# Altium PCB PCB1.PcbDoc
Units mm, origin at the board's own origin, x right, y up, seen from the top; angles counter-clockwise.
Board outline 182.19 x 56.11 mm, 2 copper layers (Top Layer, Bottom Layer); 74 components, 51 nets, 252 pads, 25 vias.
Unrouted connection lines stored in the file: 33.
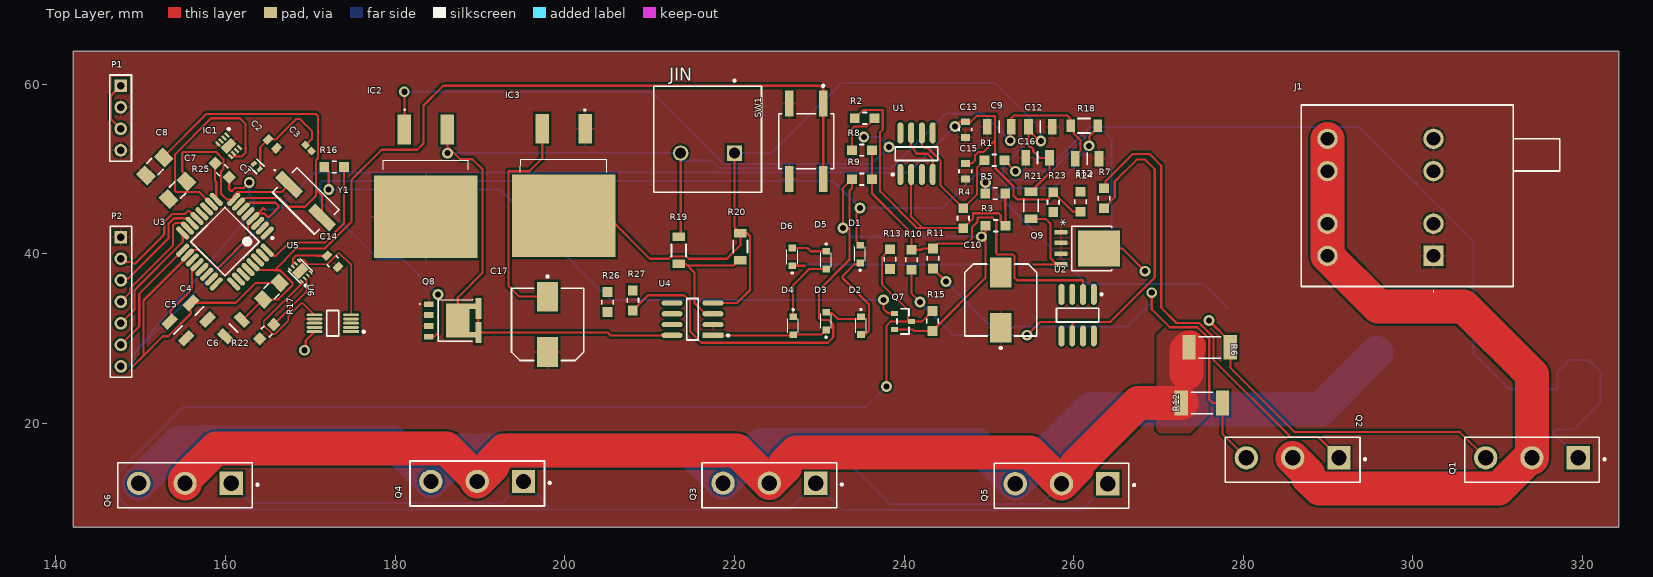
[diagram p0: Top Layer view]
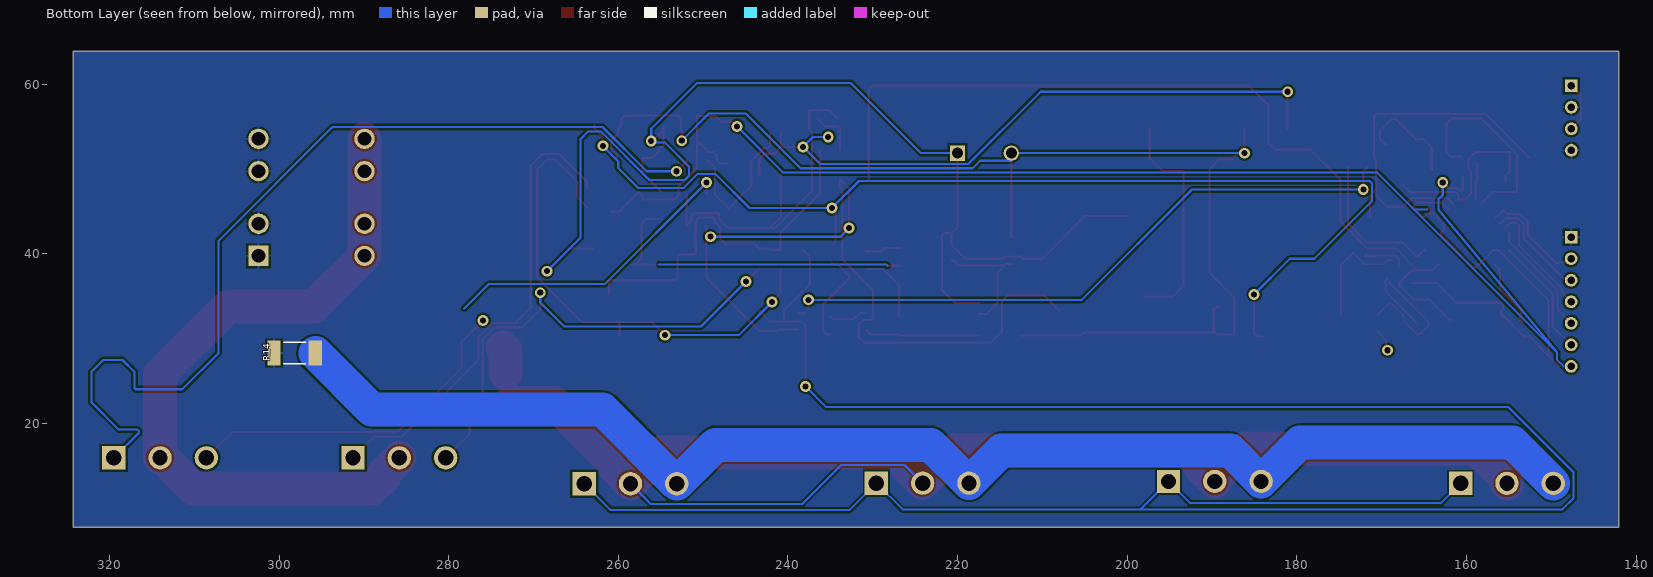
[diagram p1: Bottom Layer view, seen from below]
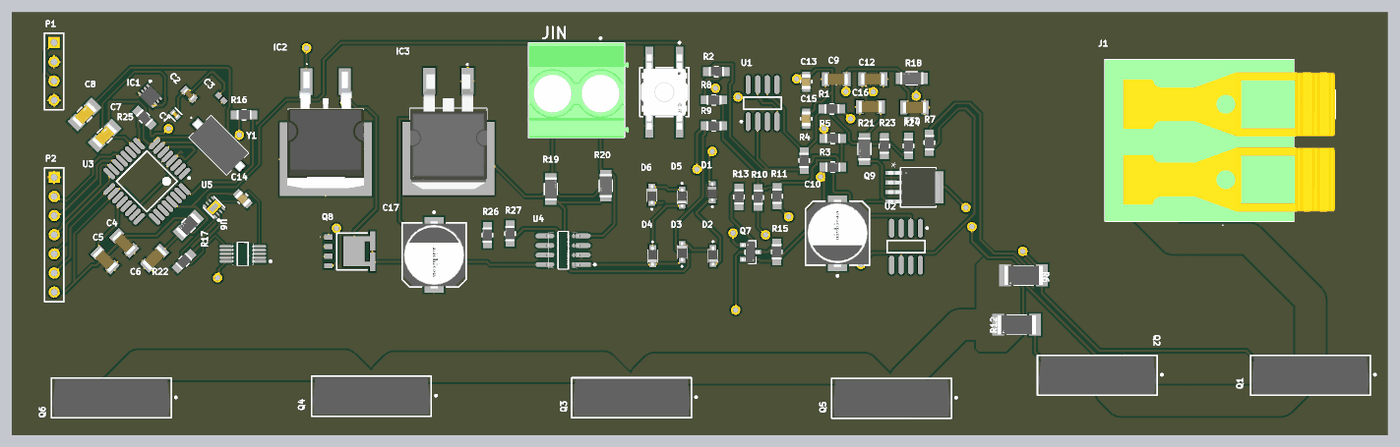
[diagram p2: 3D render of the assembled board from above, using the file's embedded part models]

## Layer stack, top to bottom
Top Solder: solder mask 0.0102, Solder Resist, Dk 3.5
Top Layer: signal copper 0.0356
Dielectric 1: dielectric 0.32, FR-4, Dk 4.8
Bottom Layer: signal copper 0.0356
Bottom Solder: solder mask 0.0102, Solder Resist, Dk 3.5

## Board outline
142.062,7.747 324.256,7.747 324.256,63.856 142.062,63.856

## Design rules (kind name [scope] priority, off if disabled: settings)
Clearance [All] p1: gap=0.254 ignorepadtopadclearanceinfootprint=FALSE except(0: Arc-Hole Track-Hole SMDPad-Hole THPad-Hole Via-Hole Fill-Hole Poly-Hole Region-Hole Text-Hole)
PolygonConnect [All] p1: connectstyle=Relief reliefconductorwidth=0.254 reliefentries=4 polygonreliefangle="90 Angle" airgapwidth=0.254
RoomDefinition Analog [InComponentClass('Analog')] p1: confinementstyle=ConfineIn formatcopy=TRUE lockcomponents=FALSE outline 0,0 50.8,0 50.8,25.4 0,25.4
RoutingVias [All] p1: holewidth=0.711 width=1.27 viastyle="Through Hole" minholewidth=0.711 minwidth=1.27 maxholewidth=0.711 maxwidth=1.27
SolderMaskExpansion [All] p1: expansion=0.102 istentingtop=FALSE
Width Width_3 [InNet('NetQ2_3')] p1: maxlimit=4 minlimit=0.254 preferedwidth=0.254 minimp=50.000000 maximp=50.000000 favimp=50.000000
Width Width_2 [InNet('NetQ3_2')] p2: maxlimit=4 minlimit=0.254 preferedwidth=0.254 minimp=50.000000 maximp=50.000000 favimp=50.000000
Width Width_1 [InNet('NetQ3_3')] p3: maxlimit=4 minlimit=0.254 preferedwidth=4 minimp=50.000000 maximp=50.000000 favimp=50.000000
Width [All] p4: maxlimit=4 minlimit=0.254 preferedwidth=0.254 minimp=50.000000 maximp=50.000000 favimp=50.000000
30 further rules are at their usual default settings.

## Classes and differential pairs
component class "Sense Amplifier": C15 R23 R24 R25 R26 R27 U6
component class Power: C9 C10 C11 C12 C16 C17 D1 D2 D3 D4 D5 D6 IC2 IC3 J2 JIN Q8 Q9 R18 R19 R20 R21 U4
component class MCU: C4 C5 C6 C7 C8 R17 SW1 U3 Y1
component class Main: J1 P2
component class "Fan Controller": C1 C2 C3 IC1 P1
component class DAC: C13 C14 R22 U5
component class Analog: Q1 Q2 Q3 Q4 Q5 Q6 Q7 R1 R2 R3 R4 R5 R6 R7 R8 R9 R10 R11 R12 R13 R14 R15 R16 U1 U2

## Components (designator, comment, footprint, x,y, rotation, side; value= is the part's Value field where it differs from the comment)
C1 "CL05A106MP5NUNC" FP-CL05A106MP5NUNC-MFG 163.678,50.292 r135 top value=10uF
C2 "CL10A226MP8NUNE" CAPC1608X105N 165.508,52.958 r135 top value=22uF
C3 "CL05B104KO5NNNC" CAPC1050X55X23ML05T13 169.774,52.476 r135 top
C4 "CL31A106MAHNNNE" CAPC3216X180N 156.904,33.241 r315 top
C5 "CL31B104KBCNNNC" CAPC3216X100N 154.381,31.013 r315 top
C6 "CL31B104KBCNNNC" CAPC3216X100N 160.934,31.242 r225 top
C7 "CL31C220JBCNNNC" FP-CL31-IPC_A 154.33,47.498 r45 top
C8 "CL31C220JBCNNNC" FP-CL31-IPC_A 151.663,50.292 r45 top
C9 "1uF" CAPC3216X178N 251.231,54.966 r0 top
C10 "UWT1H101MNL1GS" FP-UWT1H101MNL1GS-MFG 251.409,34.544 r90 top
C11 "1uF" CAPC3216X178N 261.595,51.232 r180 top
C12 "1uF" CAPC3216X178N 256.083,54.991 r180 top
C13 "C2012X7T2E104K125AE" FP-C2012-125-0_45-MFG 247.244,54.65 r270 top
C14 "C2012X7T2E104K125AE" FP-C2012-125-0_45-MFG 172.618,39.116 r315 top
C15 "C2012X7T2E104K125AE" FP-C2012-125-0_45-MFG 247.244,49.733 r270 top
C16 "1uF" CAPC3216X178N 255.753,51.308 r180 top
C17 "UWT1H101MNL1GS" FP-UWT1H101MNL1GS-MFG 197.968,31.674 r270 top
D1 "1SS355VMTE-17" UDZVTE1722B 234.823,39.488 r180 top
D2 "1SS355VMTE-17" UDZVTE1722B 234.925,32.005 r0 top
D3 "1SS355VMTE-17" UDZVTE1722B 230.81,31.588 r180 top
D4 "1SS355VMTE-17" UDZVTE1722B 226.924,31.988 r0 top
D5 "1SS355VMTE-17" UDZVTE1722B 230.81,39.727 r0 top
D6 "1SS355VMTE-17" UDZVTE1722B 226.822,39.158 r180 top
IC1 "DRV8220DSGR" SON50P200X200X80-9N 160.369,52.735 r315 top
IC2 "L7812ABD2T-TR" L7812ABD2TTR 183.617,54.649 r180 top
IC3 "L7912CD2T-TR" L7905CD2TTR 199.873,48.05 r180 top
J1 "1770393" 1770393 302.438,39.751 r90 top
JIN "1714955" PHOE-1714955_V 216.84,51.867 r180 top
P1 "Header 4" HDR1X4 147.625,59.817 r270 top
P2 "Header 7" HDR1X7 147.65,41.961 r270 top
Q1 "IRFP460APBF" FP-X13-0103-MFG 314.046,15.697 r270 top
Q2 "IRFP460APBF" FP-X13-0103-MFG 285.826,15.697 r270 top
Q3 "IRFP460APBF" FP-X13-0103-MFG 224.121,12.716 r270 top
Q4 "IRFP460APBF" FP-X13-0103-MFG 189.67,12.92 r270 top
Q5 "IRFP460APBF" FP-X13-0103-MFG 258.572,12.649 r270 top
Q6 "IRFP460APBF" FP-X13-0103-MFG 155.218,12.691 r270 top
Q7 "SS8050-G" FP-SS8050-G-MFG 239.884,32.029 r0 top
Q8 "SQJ147ELP-T1_GE3" SQJ147ELPT1_GE3 186.885,32.131 r270 top
Q9 "SQJ152ELP-T1_GE3" DPAK5_ELP-T1_GE3_VIS 262.115,40.64 r270 top
R1 "ERJ-P06F1002V" FP-ERJP06-MFG 250.666,51.029 r0 top
R2 "ERJ-P06F1002V" FP-ERJP06-MFG 235.356,55.982 r180 top
R3 "ERJ-P06F1002V" FP-ERJP06-MFG 250.793,43.307 r0 top
R4 "ERJ-P06F1002V" FP-ERJP06-MFG 246.99,44.196 r90 top
R5 "ERJ-P06F1002V" FP-ERJP06-MFG 250.768,47.117 r180 top
R6 "WSL2010R1000FEA18" FP-WSL2010-0_508-IPC_A 276.047,28.956 r180 top
R7 "ERJ-P06F1002V" FP-ERJP06-MFG 263.576,46.558 r90 top
R8 "ERJ-P06F1002V" FP-ERJP06-MFG 235.045,52.222 r0 top
R9 "ERJ-P06F1002V" FP-ERJP06-MFG 235.045,48.793 r0 top
R10 "ERJ-P06F1002V" FP-ERJP06-MFG 240.894,39.294 r270 top
R11 "ERJ-P06F1002V" FP-ERJP06-MFG 243.408,39.446 r270 top
R12 "WSL2010R1000FEA18" FP-WSL2010-0_508-IPC_A 275.133,22.403 r180 top
R13 "ERJ-P06F1002V" FP-ERJP06-MFG 238.354,39.37 r270 top
R14 "WSL2010R1000FEA18" FP-WSL2010-0_508-IPC_A 298.171,28.296 r180 bottom
R15 "ERJ-P06F1002V" FP-ERJP06-MFG 243.357,32.074 r90 top
R16 "ERJ-P06F1002V" FP-ERJP06-MFG 172.796,50.241 r0 top
R17 "RMCF1206FT10K0" FP-RMCF1206-IPC_B 165.412,35.593 r225 top
R18 "AC1206FR-104K7L" FP-AC1206-MFG 261.239,55.093 r180 top value=4.7KΩ
R19 "AC1206FR-104K7L" FP-AC1206-MFG 213.436,40.411 r90 top value=4.7KΩ
R20 "AC1206FR-104K7L" FP-AC1206-MFG 220.701,40.843 r270 top value=4.7KΩ
R21 "AC1206FR-104K7L" FP-AC1206-MFG 254.965,45.72 r270 top value=4.7KΩ
R22 "ERJ-P06F1002V" FP-ERJP06-MFG 164.839,30.828 r225 top
R23 "ERJ-P06F1002V" FP-ERJP06-MFG 257.607,46.094 r90 top
R24 "ERJ-P06F1002V" FP-ERJP06-MFG 260.807,46.126 r270 top
R25 "ERJ-P06F1002V" FP-ERJP06-MFG 159.596,49.853 r315 top
R26 "ERJ-P06F1002V" FP-ERJP06-MFG 205.029,34.309 r90 top
R27 "ERJ-P06F1002V" FP-ERJP06-MFG 208.026,34.493 r90 top
SW1 "1571634-2" FP-1571634-2-MFG 228.473,53.264 r270 top
U1 "OP07CSZ" ADI-R-8_M 241.478,51.802 r90 top
U2 "OP07CSZ" ADI-R-8_M 260.477,32.766 r270 top
U3 "ATmega328P-AU" 32A_M 159.928,41.434 r225 top
U4 "TLV9152IDR" FP-D0008A-IPC_A 215.062,32.283 r180 top
U5 "AD5693RACPZ-RL7" FP-CP-8-10-IPC_C 168.808,37.973 r135 top
U6 "INA228AIDGST" FP-DGS0010A-IPC_A 172.636,31.81 r180 top
Y1 "ECS-160-20-3X-TR" ECS160203XTR 169.443,46.228 r315 top

## Footprints (in the part's own frame and the unit in brackets; to place one, negate y for a bottom-side part, rotate by r counter-clockwise, add the part's x,y. Pads: shape width x height; smd on the part's side, far side on the other; paste and mask are expansions set on the pad)
32A_M [mm] "Thin QFP, 32-Leads, Body 7x7mm, Pitch 0.8mm, IPC Low Density"
  oval 1.95x0.6 smd: 1(-4.25,2.8) 2(-4.25,2) 3(-4.25,1.2) 4(-4.25,0.4) 5(-4.25,-0.4) 6(-4.25,-1.2) 7(-4.25,-2) 8(-4.25,-2.8) 17(4.25,-2.8) 18(4.25,-2) 19(4.25,-1.2) 20(4.25,-0.4) 21(4.25,0.4) 22(4.25,1.2) 23(4.25,2) 24(4.25,2.8)
  oval 0.6x1.95 smd: 9(-2.8,-4.25) 10(-2,-4.25) 11(-1.2,-4.25) 12(-0.4,-4.25) 13(0.4,-4.25) 14(1.2,-4.25) 15(2,-4.25) 16(2.8,-4.25) 25(2.8,4.25) 26(2,4.25) 27(1.2,4.25) 28(0.4,4.25) 29(-0.4,4.25) 30(-1.2,4.25) 31(-2,4.25) 32(-2.8,4.25)
  silkscreen extent -4.37,-2.85 2.85,3.77, body extent -3.5,-3.5 3.5,3.5, height 1.2
1770393 [mm]
  rect 2.4x2.4 hole 1.6: 1(0,0)
  round 2.4 hole 1.6: 2(0,12.5) 3(3.8,0) 4(3.8,12.5) 5(10,0) 6(10,12.5) 7(13.8,0) 8(13.8,12.5)
  silkscreen extent -4.2,-14.9 17.8,15.6, body extent -3.6,-14.9 17.8,15.6, height 29.64
ADI-R-8_M [mm] "SOIC, 8-Leads, Body 4.9x3.9mm, Pitch 1.27mm, IPC Low Density"
  oval 2.5x0.7 smd: 1(-2.45,1.905) 2(-2.45,0.635) 3(-2.45,-0.635) 4(-2.45,-1.905) 5(2.45,-1.905) 6(2.45,-0.635) 7(2.45,0.635) 8(2.45,1.905)
  silkscreen extent -2.57,-2.5 0.8,2.93, body extent -2,-2.5 2,2.5, height 1.75
CAPC1050X55X23ML05T13 [mm] "Chip Capacitor, 2-Leads, Body 1.05x0.55mm, IPC Low Density"
  rect 0.76x0.72 smd: 1(-0.49,0) 2(0.49,0)
  body extent -0.53,-0.28 0.53,0.27, height 0.55
CAPC1608X105N [mm]
  rect 0.83x1.07 smd: 1(-0.72,0) 2(0.72,0)
  body extent -0.8,-0.4 0.8,0.4, height 1.05
CAPC3216X100N [mm]
  rect 1.02x1.78 smd: 1(-1.38,0) 2(1.38,0)
  silkscreen extent 0,-0.7 0,0.7, body extent -1.6,-0.8 1.6,0.8, height 1
CAPC3216X178N [mm]
  rect 1.02x1.82 smd: 1(-1.4,0) 2(1.4,0)
  silkscreen extent 0,-0.7 0,0.7, body extent -1.6,-0.8 1.6,0.8, height 1.78
CAPC3216X180N [mm]
  rect 1.05x1.82 smd: 1(-1.39,0) 2(1.39,0)
  silkscreen extent 0,-0.7 0,0.7, body extent -1.6,-0.8 1.6,0.8, height 1.8
DPAK5_ELP-T1_GE3_VIS [mil]
  rect 21x60 smd paste+0 mask+0: 1(-75,-142) 2(-25,-142) 3(25,-142) 4(75,-142)
  rect 167x193 smd paste+0 mask+0: 5(0,34.5)
  silkscreen extent -104,-93 104,93, body extent -99,-158 99,110, height 43
ECS160203XTR [mm]
  rect 3.5x1.2 smd: 1(-2.75,0) 2(2.75,0)
  silkscreen extent -5.2,-2.05 3.5,2.05, body extent -4.38,-2.05 4.38,2.05, height 2.4
FP-1571634-2-MFG [mm]
  rect 3.1x1 smd paste+0 mask+0: 1(-4.45,2) 2(4.45,2) 3(-4.45,-2) 4(4.45,-2)
  silkscreen extent -6.67,-3.25 3.25,3.25, body extent -6.1,-3.35 6.1,3.35, height 0.25
FP-AC1206-MFG [mm]
  rect 1x1.5 smd paste+0 mask+0: 1(-1.6,0) 2(1.6,0)
  silkscreen extent -0.73,-0.85 0.73,0.85, body extent -2.2,-0.95 2.2,0.95, height 0.25
FP-C2012-125-0_45-MFG [mm]
  rect 0.8x1.05 smd paste+0 mask+0: 1(-0.925,0) 2(0.925,0)
  silkscreen extent -0.15,-0.75 0.15,0.75, body extent -1.42,-0.85 1.42,0.85, height 0.25
FP-CL05A106MP5NUNC-MFG [mm]
  rect 0.45x0.675 smd paste+0 mask+0: 1(-0.463,0) 2(0.462,0)
  silkscreen extent -0.6,-0.63 0.6,0.63, body extent -0.5,-0.25 0.5,0.25, height 0.7
FP-CL31-IPC_A [mm]
  rect 1.505x1.858 smd paste+0 mask+0: 1(-1.476,0) 2(1.476,0)
  silkscreen extent -0.42,-0.93 0.42,0.93, body extent -2.73,-1.43 2.73,1.43, height 0.25
FP-CP-8-10-IPC_C [mm]
  rect 0.556x0.242 smd paste+0 mask+0: 1(-0.978,0.75)
  rrect100% 0.556x0.242 smd paste+0 mask+0: 2(-0.978,0.25) 3(-0.978,-0.25) 4(-0.978,-0.75) 5(0.978,-0.75) 6(0.978,-0.25) 7(0.978,0.25) 8(0.978,0.75)
  rect 1.1x1.7 smd paste-1000 mask+0: 9(0,0)
  silkscreen extent -1.78,-1 1,1
FP-D0008A-IPC_A [mm]
  rect 2.469x0.622 smd paste+0 mask+0: 1(-2.414,1.905)
  rrect100% 2.469x0.622 smd paste+0 mask+0: 2(-2.414,0.635) 3(-2.414,-0.635) 4(-2.414,-1.905) 5(2.414,-1.905) 6(2.414,-0.635) 7(2.414,0.635) 8(2.414,1.905)
  silkscreen extent -4.32,-2.45 0.68,2.45, body extent -4.15,-2.95 4.15,2.95, height 0.25
FP-DGS0010A-IPC_A [mm]
  rect 1.857x0.35 smd paste+0 mask+0: 1(-2.151,1)
  rrect100% 1.857x0.35 smd paste+0 mask+0: 2(-2.151,0.5) 3(-2.151,0) 4(-2.151,-0.5) 5(-2.151,-1) 6(2.151,-1) 7(2.151,-0.5) 8(2.151,0) 9(2.151,0.5) 10(2.151,1)
  silkscreen extent -3.78,-1.5 0.72,1.5, body extent -3.58,-2 3.58,2, height 0.25
FP-ERJP06-MFG [mm]
  rect 1.15x1.15 smd paste+0 mask+0: 1(-1.175,0) 2(1.175,0)
  silkscreen extent -0.22,-0.67 0.22,0.67, body extent -1.85,-0.77 1.85,0.77, height 0.25
FP-RMCF1206-IPC_B [mm]
  rect 1.404x1.758 smd paste+0 mask+0: 1(-1.376,0) 2(1.376,0)
  silkscreen extent -0.37,-0.88 0.37,0.88, body extent -2.33,-1.13 2.33,1.13, height 0.25
FP-SS8050-G-MFG [mm]
  rect 0.8x0.6 smd paste+0 mask+0: 1(-1.01,0.95) 2(-1.01,-0.95) 3(1.01,0)
  silkscreen extent -0.7,-1.5 0.7,1.5, body extent -1.51,-1.6 1.51,1.6, height 0.25
FP-UWT1H101MNL1GS-MFG [mm]
  rect 3.5x2.5 smd paste+0 mask+0: 1(-3.25,0) 2(3.25,0)
  silkscreen extent -5.77,-4.25 4.25,4.25, body extent -5.25,-4.5 5.25,4.5, height 0.25
FP-WSL2010-0_508-IPC_A [mm]
  rect 1.57x2.899 smd paste+0 mask+0: 1(-2.435,0) 2(2.435,0)
  silkscreen extent -1.27,-1.27 1.27,1.27, body extent -3.72,-1.95 3.72,1.95, height 0.25
FP-X13-0103-MFG [mm]
  rect 2.75x2.75 hole 1.8 paste-1000 mask+0: 1(-0.237,5.46)
  round 2.75 hole 1.8 paste-1000 mask+0: 2(-0.237,0) 3(-0.237,-5.46)
  silkscreen extent -2.66,-7.94 2.66,8.68, body extent -2.76,-8.04 2.76,8.04, height 0.25
HDR1X4 [mm] "Connector; Header; 4 Position"
  rect 1.5x1.5 hole 0.9: 1(0,0)
  round 1.5 hole 0.9: 2(2.54,0) 3(5.08,0) 4(7.62,0)
  silkscreen extent -1.27,-1.27 8.89,1.27
HDR1X7 [mm] "Connector; Header; 7 Position"
  rect 1.5x1.5 hole 0.9: 1(0,0)
  round 1.5 hole 0.9: 2(2.54,0) 3(5.08,0) 4(7.62,0) 5(10.16,0) 6(12.7,0) 7(15.24,0)
  silkscreen extent -1.27,-1.27 16.51,1.27
L7812ABD2TTR [mm]
  rect 1.6x3.5 smd: 1(2.54,0) 3(-2.54,0)
  rect 12.2x9.75 smd: 2(0,10.275)
  silkscreen extent -5,-2.4 5,4.75, body extent -5.1,-1.33 5.1,14.09, height 4.83
L7905CD2TTR [mm]
  rect 1.6x3.5 smd: 1(-2.54,-6.7) 2(2.54,-6.7)
  rect 12.2x9.75 smd: 3(0,3.575)
  silkscreen extent -5.1,-9 5.1,-1.56, body extent -5.08,-7.63 5.08,7.64, height 5.01
PHOE-1714955_V [mm] "Terminal Block, 2-Leads, Body 12.7x12.5mm, Pitch 6.35mm"
  rect 1.8x1.8 hole 1.3: 1(-3.175,0)
  round 1.8 hole 1.3: 2(3.175,0)
  silkscreen extent -6.35,-8.67 6.35,4.6, body extent -6.92,-7.9 6.35,4.6, height 21.51
SON50P200X200X80-9N [mm]
  rect 0.7x0.3 smd: 1(-1.05,0.75) 2(-1.05,0.25) 3(-1.05,-0.25) 4(-1.05,-0.75) 5(1.05,-0.75) 6(1.05,-0.25) 7(1.05,0.25) 8(1.05,0.75)
  rect 1x1.7 smd: 9(0,0)
  silkscreen extent -1.52,1.28 -1.28,1.52, body extent -1,-1 1,1, height 0.77
SQJ147ELPT1_GE3 [mm]
  rect 0.68x1.1 smd: 1(-1.905,-2.913) 2(-0.635,-2.913) 3(0.635,-2.913) 4(1.905,-2.913)
  rect 2.5x0.71 smd: 5(1.4,2.913) 6(-1.4,2.913)
  rect 0.63x0.66 smd: 7(1.665,2.228) 8(-1.665,2.228)
  rect 3.96x2.82 smd: 9(0,0.487)
  silkscreen extent -2.45,-4.05 2.45,2.23
UDZVTE1722B [mm]
  rect 0.9x0.8 smd: 1(0,0.575) 2(0,-1.525)
  silkscreen extent -0.62,-1.33 0.62,1.52, body extent -0.63,-1.76 0.63,0.74, height 0.71

## Part data
C1: library part CMP-13271-000002-1, "CAP CER 10UF 10V X5R 0402", Capacitance=10uF, Manufacturer=Samsung, Temperature="-55°C to +85°C", Temperature Characteristic=X5R, Temperature Coefficient=15%, Temperature Range High=+85°C, Temperature Range Low=-55°C, Tolerance=20%, Voltage Rating=10V, Automotive=No, Category=Cap, ComponentLink2Description=Datasheet, ComponentLink2URL=http://www.samsungsem.com/kr/support/product-search/mlcc/__icsFiles/afieldfile/2019/05/10/19-CL05A106MP5NUNC.pdf, Device Class L1="Passive Components", Device Class L2=Capacitors, Device Class L3="Ceramic Capacitors", Digikey Description="CAP CER 10UF 10V X5R 0402", Height=0.7mm, Ipc Land Pattern Name=CAPC10050X50, Lead Free=Yes, Manufacturer Part Number=CL05A106MP5NUNC, Material=Ceramic, Octopart=https://octopart.com/cl05a106mp5nunc-samsung-22457395, Package=CL05A106MP5NUNC, RoHS=TRUE
C2: "Capacitor", Manufacturer_Name=SAMSUNG, Mouser Part Number=187-CL10A226MP8NUNE, Arrow Part Number=CL10A226MP8NUNE, Arrow Price/Stock=https://www.arrow.com/en/products/cl10a226mp8nune/samsung-electro-mechanics?region=nac, Datasheet Link=https://datasheet.datasheetarchive.com/originals/distributors/Datasheets-DGA10/2407063.pdf, Height=1.05mm, Manufacturer_Part_Number=CL10A226MP8NUNE, Mouser Price/Stock=https://www.mouser.co.uk/ProductDetail/Samsung-Electro-Mechanics/CL10A226MP8NUNE?qs=gRKWieUq2Hb5O0PTfRKzDQ%3D%3D
C3: library part CMP-2000-05439-1, "Chip Capacitor, 100 nF, +/- 10%, 16 V, -55 to 125 degC, 0402 (1005 Metric), RoHS, Tape and Reel", Capacitance=100nF, Case Size/Dimension=0402, Dielectric=X7R, Manufacturer="Samsung Electro-Mechanics", Rated Voltage=16V, Tolerance (%)=±10%, Datasheet URL=https://datasheet.ciiva.com/29198/458718-da-01-en-vs-kondensator-0402-29198423.pdf, Datasheet Version=Nov-10, Manufacturer URL=http://www.samsungsem.com/global/index.jsp
C4: "CAP CER 10UF 25V X5R 1206 CL31A106MAHNNNE", Capacitance=10uF, Manufacturer_Name=SAMSUNG, Mouser Part Number=187-CL31A106MAHNNNE, Supplier Part Number 1=1276-1181-1-ND, Arrow Part Number=CL31A106MAHNNNE, Arrow Price/Stock=https://www.arrow.com/en/products/cl31a106mahnnne/samsung-electro-mechanics, Datasheet Link=https://www.arrow.com/en/products/cl31a106mahnnne/samsung-electro-mechanics, Height=1.8mm, Manufacturer_Part_Number=CL31A106MAHNNNE, Mouser Price/Stock=https://www.mouser.co.uk/ProductDetail/Samsung-Electro-Mechanics/CL31A106MAHNNNE?qs=9y2YoPkPyvYkOWbcUKSn%252BQ%3D%3D, Supplier 1=Digi-Key
C5 C6: "CAP CER 0.1UF 50V X7R 1206", Capacitance=0.1uF, Manufacturer_Name=SAMSUNG, Mouser Part Number=187-CL31B104KBCNNNC, Supplier Part Number 1=1276-1017-1-ND, Arrow Part Number=CL31B104KBCNNNC, Arrow Price/Stock=https://www.arrow.com/en/products/cl31b104kbcnnnc/samsung-electro-mechanics?region=nac, Datasheet Link=https://datasheet.datasheetarchive.com/originals/distributors/Datasheets_SAMA/0fdb6a11e020a7299f4d0713dd2bd7ee.pdf, Height=1mm, Mouser Price/Stock=https://www.mouser.co.uk/ProductDetail/Samsung-Electro-Mechanics/CL31B104KBCNNNC?qs=349EhDEZ59oHABbyGq1iKA%3D%3D, Supplier 1=Digi-Key
  C5: Manufacturer_Part_Number 1=CL31B104KBCNNNC
  C6: Manufacturer_Part_Number=CL31B104KBCNNNC
C7 C8: library part CMP-13271-001055-1, "Cap Ceramic 22pF 50V C0G ±5% SMD 1206 +125°C Embossed T/R", Capacitance=22pF, Case Code (Imperial)=1206, Case Code (Metric)=3216, Dielectric=C0G, Max Operating Temperature=125°C, Min Operating Temperature=-55°C, Package Quantity=1, Temperature Coefficient=300ppm/°C, Tolerance=5%, Voltage=50V, Case/Package=1206, Depth=1.6mm, Height=0.85mm, Lead Free="Lead Free", Length=3.2mm, Material=Ceramic, Mount="Surface Mount", Packaging="Tape and Reel", Radiation Hardening=No, Thickness=0.039inch, Voltage Rating=50V, Voltage Rating (DC)=50V, Width=0.063inch
C9 C11 C12 C16: library part 12063C105MAT2A, "Capacitor 12063C105MAT2A", Manufacturer_Name=AVX, Mouser Part Number=581-12063C105MAT2A, Arrow Part Number=12063C105MAT2A, Arrow Price/Stock=https://www.arrow.com/en/products/12063c105mat2a/avx, Datasheet Link=https://spicat.kyocera-avx.com/product/mlcc/chartview/12063C105MAT2A/DataSheet/X7R, Height=1.78mm, Manufacturer_Part_Number=12063C105MAT2A, Mouser Price/Stock=https://www.mouser.com/Search/Refine.aspx?Keyword=581-12063C105MAT2A
C10 C17: library part CMP-2000-07373-2, "CAP ALUM 100UF 20% 50V SMD", Capacitance=100uF, Case/Package=Radial, Dielectric Material=Aluminium, Leakage Current=3uA, Max Operating Temperature=105°C, Min Operating Temperature=-55°C, Package Quantity=500, Ripple Current=140mA, Tolerance=20%, Voltage=50V, Construction=Cylindrical, Diameter=8mm, Dissipation Factor=0.14%, Height=10mm, Height - Seated (Max)=0.413inch, Lead Free="Lead Free", Length=10mm, Life (Hours)=1000Hour, Mount="Surface Mount", Number of Pins=2, Packaging="Tape and Reel", Radiation Hardening=No, REACH SVHC="No SVHC", Ripple Current (AC)=140mA, RoHS Compliant=Yes, Series=WT, Termination=SMD/SMT, Voltage Rating=50V, Voltage Rating (DC)=50V
C13 C14 C15: library part CMP-08246-004341-1, "CAP CER 0.1UF 250V X7T 0805", Capacitance=100nF, Case Code (Imperial)=0805, Case Code (Metric)=2012, Dielectric=X7T, Max Operating Temperature=125°C, Min Operating Temperature=-55°C, Package Quantity=1, Resistor Type=Ceramic, Tolerance=10%, Voltage Rating=250V, Case/Package=0805, Depth=1.25mm, Features="Soft Termination", Height=1.25mm, Length=2mm, Mount="Surface Mount", Packaging="Tape and Reel", REACH SVHC="No SVHC", RoHS Compliant=Yes, Series=C, Termination=SMD/SMT, Thickness=0.049inch, Voltage Rating (DC)=250V, Weight=0.000194oz, Width=0.05inch
D1 D2 D3 D4 D5 D6: "Diode", Manufacturer_Name="ROHM Semiconductor", Mouser Part Number=755-1SS355VMTE-17, Datasheet Link=https://datasheet.datasheetarchive.com/originals/distributors/Datasheets_SAMA/726503b2436a9ce4bc644e4966373f1b.pdf, Height=0mm, Manufacturer_Part_Number=1SS355VMTE-17, Mouser Price/Stock=https://www.mouser.co.uk/ProductDetail/ROHM-Semiconductor/1SS355VMTE-17?qs=IsRgwgmxh693733hapxfjA%3D%3D
IC1: "Integrated Circuit", Manufacturer_Name="Texas Instruments", Mouser Part Number=595-DRV8220DSGR, Arrow Part Number=DRV8220DSGR, Arrow Price/Stock=https://www.arrow.com/en/products/drv8220dsgr/texas-instruments?region=nac, Datasheet Link=https://www.ti.com/lit/gpn/drv8220, Height=0.8mm, Manufacturer_Part_Number=DRV8220DSGR, Mouser Price/Stock=https://www.mouser.co.uk/ProductDetail/Texas-Instruments/DRV8220DSGR?qs=A6eO%252BMLsxmR1BpX9iMystg%3D%3D
IC2: "Integrated Circuit", Manufacturer_Name=STMicroelectronics, Mouser Part Number=511-L7812ABD2T-TR, Arrow Part Number=L7812ABD2T-TR, Arrow Price/Stock=https://www.arrow.com/en/products/l7812abd2t-tr/stmicroelectronics?region=europe, Datasheet Link=https://componentsearchengine.com/Datasheets/1/L7812ABD2T-TR.pdf, Height=4.7mm, Manufacturer_Part_Number=L7812ABD2T-TR, Mouser Price/Stock=https://www.mouser.co.uk/ProductDetail/STMicroelectronics/L7812ABD2T-TR?qs=llfGyK1OjE3hWetai%252BQcKg%3D%3D
IC3: "Integrated Circuit", Manufacturer_Name=STMicroelectronics, Mouser Part Number=511-L7912CD2T-TR, Arrow Part Number=L7912CD2T-TR, Arrow Price/Stock=https://www.arrow.com/en/products/l7912cd2t-tr/stmicroelectronics?region=nac, Datasheet Link=http://www.st.com/web/en/resource/technical/document/datasheet/CD00000450.pdf, Height=4.6mm, Manufacturer_Part_Number=L7912CD2T-TR, Mouser Price/Stock=https://www.mouser.co.uk/ProductDetail/STMicroelectronics/L7912CD2T-TR?qs=3sbPgdekz232r2AmOaAD%252Bg%3D%3D
J1: "Connector", Manufacturer_Name="Phoenix Contact", Mouser Part Number=651-1770393, Arrow Part Number=1770393, Arrow Price/Stock=https://www.arrow.com/en/products/1770393/phoenix-contact, Datasheet Link=https://www.phoenixcontact.com/online/portal/us/pxc/product_detail_page/!ut/p/z1/3Vdbb9owFP4r9IFHYzsXJ5m0B6BoQCkLJawkL1HsGOQ1tyYBOn79HC7dQBs8VGhaoiPFds75zsX-rBzowTn0kmAtlkEp0iSI5Nz1iO90nF7PVgj-OtE7aHCvd3sj7Qn3xwr8Bj3olQGFLq5GkaB5kP-A7qrgSbWQiVB-MgykWmo1Tx, Height=29.2mm, Manufacturer_Part_Number=1770393, Mouser Price/Stock=https://www.mouser.co.uk/ProductDetail/Phoenix-Contact/1770393?qs=MfVUZiz0PxY16TK7qzndTA%3D%3D
JIN: library part CMP-2000-05797-1, "PC Terminal Block, Pitch 6.35 mm, 1 x 2 Position, Height 21.5 mm, Tail Lenght 5.1 mm, RoHS, Bulk", Manufacturer="Phoenix Contact", Package Description="PC Terminal Block, Pitch 6.35 mm, 1 x 2 Position, Height 21.5 mm, Tail Lenght 5.1 mm", Datasheet URL=http://media.digikey.com/pdf/Data%20Sheets/Phoenix%20Contact%20PDFs/1714955.pdf, Datasheet Version=02/2010, Manufacturer URL=http://www.phoenixcontact.com/, Mounting Technology=ThroughHole, Package Reference=1714955
P1: "Header, 4-Pin", LatestRevisionDate=17-Jul-2002, LatestRevisionNote="Re-released for DXP Platform.", Publisher="Altium Limited"
P2: "Header, 7-Pin", LatestRevisionDate=17-Jul-2002, LatestRevisionNote="Re-released for DXP Platform.", Publisher="Altium Limited"
Q1 Q2 Q3 Q4 Q5 Q6: library part CMP-02550-000181-1, "MOSFET N-CH 500V 20A TO-247AC", Continuous Drain Current=20A, Drain To Source Breakdown Voltage=500V, Drain To Source Resistance=0.27Ω, Gate To Source Voltage=30V, Input Capacitace At Vds="3100pF @ 25V", Manufacturer=Vishay, Max Forward Diode Voltage=1.8V, Max Junction Temp=+150°C, Package=X13-0103, Power Dissipation=280W, Pulse Drain Current=80A, Temperature="-55°C to +150°C", Temperature Range Low=-55°C, Automotive=No, Category=Trans, ComponentLink2Description=Datasheet, ComponentLink2URL=http://www.vishay.com/docs/91234/sihfp460.pdf, Depletion Mode=False, Device Class L1="Discrete Semiconductors", Device Class L2=Transistors, Device Class L3=MOSFETs, Digikey Description="MOSFET N-CH 500V 20A TO-247AC", Drain To Source Voltage=500V, Gate Charge At Vgs="105nC @ 10V", Height=25.11mm, Lead Free=Yes, Manufacturer Part Number=IRFP460APBF, Mouser Description="MOSFET N-Chan 500V 20 Amp", Number Of Channels=1, Number Of N Channels=1, Octopart=https://octopart.com/irfp460apbf-vishay-46526673, Reverse Recovery Charge=5000nC, Reverse Recovery Time=480ns, RoHS=TRUE, Rthja Max=40°C/W, Standoff Height=3.71mm, Temperature Range High=+150°C, Threshold Vgs Max=4V, Threshold Vgs Min=2V, Turn Off Delay Time=45ns, Turn On Delay Time=18ns
Q7: library part CMP-20235-000001-1, "NPN TRANSISTOR 1.5A 40V SOT-23 R", Case/Package=TO-236-3, Collector Emitter Breakdown Voltage=25V, Collector Emitter Voltage (VCEO)=400mV, Max Collector Current=1.5A, Max Power Dissipation=300mW, Transition Frequency=100MHz, Max Breakdown Voltage=25V, Mount="Surface Mount", Packaging="Tape and Reel", RoHS Compliant=Yes
Q8: "MOSFET (N-Channel)", Manufacturer_Name=Vishay, Mouser Part Number=78-SQJ147ELP-T1_GE3, Arrow Part Number=SQJ147ELP-T1_GE3, Arrow Price/Stock=https://www.arrow.com/en/products/sqj147elp-t1-ge3/vishay?region=nac, Datasheet Link=https://www.vishay.com/docs/77857/sqj147elp.pdf, Height=1.227mm, Manufacturer_Part_Number=SQJ147ELP-T1_GE3, Mouser Price/Stock=https://www.mouser.co.uk/ProductDetail/Vishay-Siliconix/SQJ147ELP-T1_GE3?qs=81r%252BiQLm7BRdyhBg3DuaKw%3D%3D
Q9: "No Description Available", Mfr_Name=Vishay, Copyright="Copyright (C) 2023 Ultra Librarian. All rights reserved.", Manufacturer_Part_Number=SQJ152ELP-T1_GE3, RefDes=RefDes, Type=DEV
R1 R2 R3 R4 R5 R7 R8 R9 R10 R11 R13 R15 R16 R22 R23 R24 R25 R26 R27: library part CMP-05422-000126-1, "RES SMD 10K OHM 1% 1/2W 0805", Case Code (Imperial)=0805, Case Code (Metric)=2012, Max Operating Temperature=155°C, Max Power Dissipation=500mW, Min Operating Temperature=-55°C, Package Quantity=5000, resistance=10kR, Resistance Tolerance=1%, Resistor Type="Thick Film", Temperature Coefficient=100ppm/°C, Voltage Rating=150V, Case/Package=0805, Construction=Rectangular, Contact Plating=Tin, Depth=1.25mm, Features="Automotive AEC-Q200", Height=0.6mm, Lead Free="Lead Free", Length=2mm, Military Standard=Not, Mount="Surface Mount", Number of Terminations=2, Packaging="Tape and Reel", Power Rating=500mW, Radiation Hardening=No, REACH SVHC="No SVHC", RoHS Compliant=Yes, Series=ERJ, Technology="THICK FILM", Termination=SMD/SMT, Tolerance=1%, Voltage Rating (DC)=150V, Width=1.2mm
R6 R12 R14: library part CMP-00030-39744249-1, "WSL2010R1000FEA18 SMD Chip Resistor, 100 MOhm, ± 1%, 1 W, 2010 [5025 Metric], Metal Strip, High Power", Case Code (Imperial)=2010, Case Code (Metric)=5025, Max Operating Temperature=170°C, Min Operating Temperature=-65°C, Power Rating=1W, resistance=100mΩ, Temperature Coefficient=75ppm/°C, Tolerance=1%, Case/Package=2010, Composition="Metal Element, Metal Strip", Contact Plating=Tin, Depth=2.54mm, Height=635µm, Lead Free="Lead Free", Length=5mm, NexarPartId=39744249, Number of Pins=2, Packaging="Cut Tape", Radiation Hardening=No, REACH SVHC=Unknown, RoHS=Compliant, Schedule B="8533210045, 8533210045", Termination=SMD/SMT, Weight=38.895546mg, Width=2.5mm
R17: library part CMP-26527-000151-1, "10kΩ ±1% 0.25W 1206 Thick Film Chip Resistor AEC-Q200 compliant RMCF1206FT10K0", Case Code (Imperial)=1206, Case Code (Metric)=3216, Max Operating Temperature=155°C, Max Power Dissipation=250mW, Min Operating Temperature=-55°C, resistance=10kR, Resistor Type="Thick Film", Temperature Coefficient=100ppm/°C, Tolerance=1%, Case/Package=1206, Construction=Rectangular, Contact Plating=Tin, Depth=1.6mm, Features="Automotive AEC-Q200", Height=0.028inch, Lead Free="Lead Free", Length=3.2mm, Military Standard=Not, Mount="Surface Mount", Number of Terminations=2, Packaging="Tape and Reel", Power Rating=250mW, Radiation Hardening=No, RoHS Compliant=Yes, Series=RMCF, Size Code=1206, Width=0.063inch
R18 R19 R20 R21: library part CMP-03412-035718-1, "AC1206 4.7KΩ 0.25W 1.00%", Manufacturer=Yageo, Package=AC1206, Power Rating=0.25W, resistance=4.7KΩ, Temperature="-55°C to +155°C", Temperature Range High=+155°C, Temperature Range Low=-55°C, Tolerance=0.01, Voltage Rating=200V, Automotive=Yes, Automotive Grade="Grade 0", Category=Res, ComponentLink2Description=Datasheet, ComponentLink2URL=http://www.yageo.com/NewPortal/yageodocoutput?fileName=/pdf/R-Chip/PYu-AC_51_RoHS_L_6.pdf, Composition="Thick Film", Device Class L1="Passive Components", Device Class L2=Resistors, Device Class L3="Chip SMD Resistors", Footprint Url=http://www.yageo.com/exep/pages/download/literatures/PYu-R_Mount_10.pdf, Height=0.65mm, Ipc Land Pattern Name=RESC310160X55, Lead Free=Yes, Manufacturer Part Number=AC1206FR-104K7L, Octopart=https://octopart.com/ac1206fr-104k7l-yageo-84718857, RoHS=TRUE, Series=AC
SW1: library part CMP-03407-000008-1, "SWITCH TACTILE SPST-NO 0.05A 24V", Actuator Color=Natural, Case/Package=SMD/SMT, Contact Current Rating=50mA, Max Operating Temperature=85°C, Max Voltage Rating (DC)=12V, Min Operating Temperature=-40°C, Operating Force=160gf, Package Quantity=1000, Actuator Length=0.094inch, Actuator Material=Rubber, Actuator Type=Standard, Contact Material="Stainless Steel", Contact Plating=Silver, Current Rating=50mA, Depth=10mm, ELV=Compliant, Illumination Type=Illuminated, Lead Free="Lead Free", Length=6.2mm, Max Current Rating=50mA, Mechanical Life=5000000Cycles, Mount="Surface Mount", Orientation=Straight, Packaging="Tape and Reel", Radiation Hardening=No, RoHS Compliant=Yes, Switch Function=Off-Mom, Termination="Gull Wing", Throw Configuration=SPST, Type=Switch, Voltage Rating (DC)=12V
U1 U2: library part CMP-0384-01158-1, "Single Channel Low Noise Operational Amplifier, 600 KHz BW, 300 mV/us SR, Industrial, 8-pin SOIC (R-8), Tube", Generic Part Number=OP07, Manufacturer="Analog Devices", # OpAmps per Pkg=1, Code_JEDEC=MS-012-AA, ComponentLink1Description="Manufacturer URL", ComponentLink1URL=http://www.analog.com/en/index.html, ComponentLink2Description=Datasheet, ComponentLink2URL=http://www.analog.com/static/imported-files/data_sheets/OP07.pdf, ComponentLink3Description="Package Specification", ComponentLink3URL=http://www.analog.com/static/imported-files/packages/PKG_PDF/SOIC_Narrow%20(R)/R_8.pdf, DatasheetVersion="Rev. G", Mounting Technology="Surface Mount", PackageDescription="8-Pin Standard Small Outline Package, Body 3.9 x 4.9 mm, Pitch 1.27 mm", PackageReference=R-8, PackageVersion=060506-A, Packing=Tube, PartNumber=OP07CSZ, Slew Rate=300mV/us, Small Signal Bandwidth=600KHz, V Span Max=44V, V Span Min=6V
U3: library part CMP-0095-00269-2, "8-bit AVR Microcontroller, 32KB Flash, 1KB EEPROM, 2KB SRAM, 32-pin TQFP, Industrial Grade (-40°C to 85°C)", Code_JEDEC=MS-026-ABA, ComponentLink1Description="Manufacturer URL", ComponentLink1URL=http://www.atmel.com/, ComponentLink2Description="ATmega48A/48PA/88A/88PA/168A/168PA/328/328P Datasheet", ComponentLink2URL=http://www.atmel.com/dyn/resources/prod_documents/doc8271.pdf, ComponentLink3Description="ATmega48A/48PA/88A/88PA/168A/168PA/328/328P Summary", ComponentLink3URL=http://www.atmel.com/dyn/resources/prod_documents/8271S.pdf, DatasheetVersion="revD, May-2011", PackageDescription="32-Lead, 7x7x1.0 mm Body, 0.8mm Lead Pitch, Thin Profile Plastic Quad Flat Package (TQFP)", PackageReference=32A, PackageVersion="revC, Oct-2010", RevisionNote="DatasheetVersion & PackageVersion updated. URLs added."
U4: library part CMP-04895-000148-1, "IC OPAMP GP 2 CIRCUIT 8SOIC"
U5: library part CMP-09082-000029-1, "IC DAC 16BIT V-OUT 8LFCSP", Max Input Voltage=5.5V, Max Operating Temperature=105°C, Min Operating Temperature=-40°C, Min Output Voltage=0uV, Min Supply Voltage=2.7V, Differential Output=No, Integral Nonlinearity (INL)=8LSB, Interface=I2C, Lead Free="Contains Lead", Max Output Voltage=5.5V, Max Supply Voltage=5.5V, Mount="Surface Mount", Number of Bits=16, Number of D/A Converters=1, Number of DAC Channels=1, Number of Pins=8, Output Type=Voltage, Packaging="Tape and Reel", Polarity=Unipolar, Resolution=16b, RoHS Compliant=Yes, Settling Time=5us, Signal to Noise Ratio (SNR)=90dB, Slew Rate=0.7V/µs
U6: library part CMP-04895-000416-1, "85-V, 20-BIT, ULTRA-PRECISE, I2C"
Y1: "Crystal or Oscillator", Manufacturer_Name=ECS, Mouser Part Number=520-160-20-3XT, Supplier Part Number 1=XC1776CT-ND, Arrow Part Number=ECS-160-20-3X-TR, Arrow Price/Stock=https://www.arrow.com/en/products/ecs-160-20-3x-tr/ecs-international?region=nac, Datasheet Link=https://www.arrow.com/en/products/ecs-160-20-3x-tr/ecs-international, Height=2.3mm, Manufacturer_Part_Number=ECS-160-20-3X-TR, Mouser Price/Stock=https://www.mouser.co.uk/ProductDetail/ECS/ECS-160-20-3X-TR?qs=7Z%2FjUg96RbU1ElbRFXn8Rw%3D%3D, Supplier 1=Digi-Key

## Via types
v1: diameter 1.27, hole 0.711, Top Layer to Bottom Layer, 25 vias

## Nets (pads, with @x,y where several pads share a name; then routed paths per layer and width w, separated by ;. In a path a pad name is that pad's centre, name@x,y a point inside that pad or via, vN(x,y) a via of type N, cw(c..) or ccw(c..) an arc to the next point about the centre after c; other vN are vias at no path point)
+5V: C4.1 C13.1 C15.1 IC1.8 P2.7 R17.1 R23.2 R24.2 R25.2 U3.4 U3.6 U3.18 U5.1 U6.6 | length 246.1
  Top Layer w0.15: U5.1 169.072,36.648 169.072,36.583 164.527,32.038 164.527,31.523 165.533,30.517 165.806,30.517 167.377,32.088 167.377,32.607 168.948,34.178 169.072,34.178 170.463,32.788 U6.6
  Top Layer w0.254: 149.047,26.721 150.317,27.991 ; U3.18 155.508,39.675 150.317,34.484 150.317,27.991 ; U3.18@155.592,39.759 156.145,40.312 156.145,40.387 156.22,40.387 156.269,40.436 156.833,40.436 158.907,38.362 159.118,38.362 163,42.244 163,42.454 162.623,42.831 162.623,43.396 162.672,43.445 162.672,43.519 163.225,44.072 163.3,44.072 163.3,44.147 163.853,44.7 163.928,44.7 163.977,44.749 164.541,44.749 164.918,44.372 165.128,44.372 166.216,45.46 166.216,45.67 165.862,46.025 162.883,46.025 162.146,45.288 U3.6 ; R25.2 160.426,47.588 160.575,47.439 160.786,47.439 161.124,47.777 162.154,47.777 v1(162.789,48.412) ; U3.4 163.893,44.833 164.449,45.39 164.627,45.212 ; R17.1 163.54,36.566 161.198,34.224 C4.1 155.684,33.987 155.684,33.424 155.921,33.187 155.921,32.959 153.238,30.277 152.603,30.277 150.317,27.991 ; v1(245.999,55.016) 246.558,55.575 C13.1 247.879,55.575 248.564,56.261 250.723,56.261 250.723,53.365 ; C15.1 248.016,50.658 248.387,51.029 248.387,51.614 248.758,51.985 249.343,51.985 250.723,53.365 ; R24.2 259.925,44.951 R23.2 257.159,46.821 257.159,46.555 257.01,46.406 254.457,46.406 254.424,46.439 253.328,46.439 252.908,46.859 252.908,47.93 250.723,50.114 250.723,53.365
  Bottom Layer w0.254: 148.539,26.721 149.327,27.508 149.327,28.397 ; v1(162.789,48.412) 162.789,46.929 163.297,46.421 163.297,45.212 149.327,28.397 ; 164.627,45.212 165.964,45.212 ; v1(245.999,55.016) 240.552,49.57 170.499,49.57 149.327,28.397
+12: C1.1 C2.2 C3.2 IC1.1 | length 12.8
  Top Layer w0.254: C1.1 164.084,49.965 164.084,52.553 165.083,53.552 165.491,53.552 165.575,53.467 165.909,53.467 168.344,55.902 168.761,55.902 170.205,54.458 170.205,53.601 C3.2
+12V: C10.2 IC2.1 R13.2 U1.4 U1.7 U2.4 U2.7 | length 78.7
  Top Layer w0.254: IC2.1 v1(181.077,59.106) ; v1(238.227,52.603) 240.64,52.603 240.843,52.807 ; U1.7 240.843,52.807 ; U1.4 243.383,51.181 242.773,51.791 241.503,51.791 240.843,52.807
  Bottom Layer w0.254: v1(181.077,59.106) 210.21,59.106 218.73,50.586 236.209,50.586 v1(238.227,52.603) 237.058,53.772 v1(235.255,53.772)
+18: C9.2 C11.2 IC2.3 JIN.2 Q8.5 Q8.6 Q8.7 Q8.8 Q8.9 R18.2 R19.2 U4.8 | length 155
  Top Layer w0.254: v1(186.157,51.867) 186.157,52.654 ; IC2.3 186.157,52.654 ; Q8.8 189.306,33.796 189.571,33.531 Q8.6 Q8.5 ; U4.8 205.384,30.378 205.032,30.731 Q8.5 ; R19.2 213.665,42.011 JIN.2 ; v1(252.527,53.34) 252.527,54.48 252.631,54.585 C9.2 252.631,55.985 252.933,56.286 259.283,56.286 259.639,55.93 R18.2 260.012,54.72 260.012,54.186 260.807,53.391 260.807,52.164 260.658,52.015 260.578,52.015 260.195,51.632 C11.2 ; 186.157,52.654 187.655,51.156 189.103,51.156 190.297,49.962 190.297,37.744 187.372,34.82 Q8.9 187.372,30.466 Q8.7 189.306,30.466 189.571,30.731 Q8.5
  Bottom Layer w0.254: v1(186.157,51.867) JIN.2 213.665,50.978 217.326,50.978 218.226,50.078 238.52,50.078 244.983,56.54 249.326,56.54 v1(252.527,53.34)
-12V: C17.1 IC3.2 | length 26.7
  Top Layer w0.254: IC3.2 197.333,51.257 195.809,49.733 193.37,49.733 193.37,36.22 194.64,34.95 197.968,34.95 C17.1
-18: C12.2 C16.1 IC3.3 JIN.1 Q9.5 R20.1 R21.1 U4.4 | length 149.4
  Top Layer w0.254: IC3.3 204.978,44.475 210.033,39.421 212.257,39.421 212.528,39.692 214.344,39.692 214.616,39.421 219.12,39.421 219.57,39.87 219.57,39.901 219.793,40.124 219.824,40.124 220.701,41.001 R20.1 ; U4.4 220.294,34.188 221.844,35.738 221.844,42.088 221.488,42.443 R20.1 ; JIN.1 220.015,43.129 R20.1 ; C12.2 C12.2@254.683,54.788 ; R21.1 254.965,47.343 257.153,49.53 C16.1 256.007,51.308 255.244,52.071 255.244,52.376 255.02,52.599 254.832,52.599 254.683,52.748 C12.2@254.683,54.788 ; v1(256.134,53.315) 255.959,53.315 254.683,54.591 C12.2@254.683,54.788 ; Q9.5 265.735,40.64 v1(268.427,37.948)
  Bottom Layer w0.254: JIN.1 224.307,51.867 232.562,60.122 250.749,60.122 256.134,54.737 v1(256.134,53.315) ; v1@255.908,53.137 254.533,53.137 251.663,50.267 251.663,49.2 252.171,48.692 256.342,48.692 262.09,54.439 263.543,54.439 264.465,53.518 264.465,41.91 v1(268.427,37.948)
GND: C1.2 C2.1 C3.1 C4.2 C5.2 C6.2 C7.1 C8.1 C9.1 C10.1 C11.1 C12.1 C13.2 C14.2 C15.2 C16.2 C17.2 IC1.4 IC1.9 IC2.2 IC3.1 J1.1 J1.3 J1.5 J1.7 P1.2 P1.4 P2.1 Q8.1 Q8.2 Q8.3 Q9.1 Q9.2 Q9.3 R14.1 R22.2 SW1.3 SW1.4 U3.3 U3.5 U3.21 U4.2 U5.3 U5.4 U5.9 U6.7
GND: Q7.2 R3.1 R9.1 R15.1 R27.1 | length 93.7
  Top Layer w0.254: R27.1 209.811,35.103 214.071,35.103 214.768,34.406 214.768,30.85 216.103,29.515 231.013,29.515 231.648,30.15 231.648,31.674 231.14,32.182 230.226,32.182 229.972,32.436 229.972,35.712 233.578,39.319 233.578,47.447 233.87,47.739 R9.1 232.791,47.714 v1(232.791,43.028) ; Q7.2 241.021,31.079 241.201,30.899 R15.1 249.618,37.159 249.618,42.012 249.618,42.481 ; v1(249.149,42.012) 249.618,42.481 ; R3.1 249.618,42.481
  Bottom Layer w0.254: v1(232.791,43.028) 233.807,42.012 v1(249.149,42.012)
NetC5_1: C5.1 U3.20 | length 8.2
  Top Layer w0.254: C5.1 153.674,32.258 153.674,32.8 153.5,32.974 153.5,33.281 156.047,35.829 156.047,37.951 156.096,38 156.096,38.168 U3.20
NetC6_1: C6.1 R17.2 SW1.1 SW1.2 U3.29 | length 103.5
  Top Layer w0.254: C6.1 162.037,32.218 R17.2 166.222,34.62 167.884,36.282 167.884,36.598 166.417,38.065 165.786,38.065 ; U3.29 163.384,38.712 164.021,38.075 165.786,38.065 ; SW1.2 SW1.1 230.473,59.417 230.073,59.817 185.674,59.817 183.337,57.48 183.337,53.01 182.601,52.273 178.41,52.273 174.828,48.692 174.828,43.738 171.729,40.639 168.351,40.639 165.786,38.065
NetC7_2: C7.2 U3.8 Y1.1 | length 22.3
  Top Layer w0.254: C7.2 155.374,49.214 154.889,49.699 154.889,51.87 155.038,52.019 158.877,52.019 159.741,51.156 159.741,49.987 159.461,49.708 159.461,47.092 160.134,46.419 U3.8 160.953,46.888 161.334,47.269 166.596,47.269 Y1.1
NetC8_2: C8.2 U3.7 Y1.2 | length 44
  Top Layer w0.254: C8.2 152.707,51.461 157.736,56.49 170.637,56.49 170.891,56.236 170.891,51.257 170.663,51.029 170.663,47.574 ; U3.7 162.223,46.558 166.446,46.558 167.462,45.542 169.367,45.542 170.663,46.838 170.663,47.574 ; Y1.2 171.388,46.849 170.663,47.574
NetC14_1: C14.1 U5.7 | length 5.1
  Top Layer w0.254: U5.7 167.94,39.42 168.328,39.808 170.67,39.808 170.708,39.77 C14.1
NetD1_1: D1.1 D2.2 | length 11.6
  Top Layer w0.254: D1.1 234.667,38.757 234.141,38.757 232.744,37.36 232.744,37.149 235.864,34.029 235.864,30.912 235.433,30.48 D2.2
NetD1_2: D1.2 Q8.4 R18.1 | length 130.9
  Top Layer w0.254: Q8.4 184.607,30.226 185.039,30.658 v1(185.039,35.204) ; D1.2 234.773,41.013 234.5,41.286 234.5,41.351 234.417,41.435 234.417,44.733 234.823,45.139 v1(234.823,45.39) ; v1(261.823,52.736) 261.875,52.788 261.875,53.879 262.839,54.843 R18.1
  Bottom Layer w0.254: v1(185.039,35.204) 180.823,39.421 177.927,39.421 171.145,46.203 171.145,48.336 171.399,48.59 231.623,48.59 v1(234.823,45.39) 244.543,45.39 248.582,49.428 250.647,49.428 252.298,47.777 257.683,47.777 260.021,50.115 260.021,50.891 261.823,52.694 v1(261.823,52.736)
NetD2_1: D2.1 D3.2 | length 4.6
  Top Layer w0.254: D3.2 230.9,33.024 231.492,33.024 232.207,32.309 234.653,32.309 D2.1
NetD3_1: D3.1 D4.2 U4.1 | length 13.6
  Top Layer w0.254: U4.1 226.839,30.378 D4.2 230.259,30.463 230.487,30.69 230.487,30.74 230.76,31.013 D3.1
NetD4_1: D4.1 D5.2 | length 8.4
  Top Layer w0.254: D4.1 226.924,36.297 228.829,38.202 D5.2
NetD5_1: D5.1 D6.2 | length 4.1
  Top Layer w0.254: D6.2 228.625,40.683 229.006,40.302 D5.1
NetD6_1: D6.1 Q9.4 R21.2 | length 39.8
  Top Layer w0.254: D6.1 228.27,38.583 ; R21.2 256.717,44.12 257.277,43.561 257.277,39.472 258.013,38.735 Q9.4 255.295,38.735
  Bottom Layer w0.254: 228.27,38.583 228.422,38.735 255.194,38.735
NetIC1_2: IC1.2 IC1.3 P1.1 P1.3 | length 6
  Top Layer w0.254: P1.3 146.482,55.88 146.482,58.674 P1.1
NetIC1_5: IC1.5 IC1.6 U3.10 | length 25
  Top Layer w0.254: U3.10 156.921,47.269 154.203,47.269 154.051,47.422 154.051,51.751 158.282,55.982 161.696,55.982 162.331,55.347 162.331,52.584 162.376,52.539 162.376,52.224 162.331,52.179 162.331,51.892 161.902,51.462 IC1.5
NetJ1_2: J1.2 J1.4 J1.6 J1.8 Q1.2 Q2.2 U6.8 | length 85
  Top Layer w4: Q2.2 287.657,14.104 287.657,13.626 288.978,12.306 310.089,12.306 313.718,15.935 Q1.2 314.046,25.749 305.987,33.807 295.881,33.807 J1.2 J1.4 J1.6 J1.8
NetP2_2: P2.2 U3.13 | length 13
  Top Layer w0.254: P2.2 147.987,39.421 148.394,39.014 148.971,39.014 149.132,38.853 149.343,38.853 152.768,42.278 152.768,43.753 153.706,44.691 155.181,44.691 155.524,45.034 155.762,45.034 U3.13
NetP2_3: P2.3 U3.14 | length 12.7
  Top Layer w0.254: P2.3 147.853,37.084 148.539,37.084 153.276,41.821 153.276,43.543 153.917,44.183 155.388,44.183 155.98,43.591 U3.14
NetP2_4: P2.4 U3.15 | length 13.6
  Top Layer w0.254: P2.4 148.768,35.458 148.768,35.946 153.784,40.963 153.784,43.332 154.07,43.618 154.916,43.618 U3.15
NetP2_5: P2.5 U3.16 | length 13.7
  Top Layer w0.254: P2.5 149.276,33.426 149.276,35.736 154.943,41.403 U3.16
NetP2_6: P2.6 U3.17 | length 14.2
  Top Layer w0.254: P2.6 149.809,31.42 149.809,35.275 U3.17
NetQ1_1: Q1.1 R1.2 | length 111.7
  Top Layer w0.254: R1.2 v1(253.136,49.733)
  Bottom Layer w0.254: v1(253.136,49.733) 256.665,49.733 261.88,54.947 293.693,54.947 293.798,54.843 293.823,54.843 307.137,41.529 307.137,28.303 311.418,24.022 316.93,24.022 317.079,24.171 317.079,26.081 318.473,27.476 320.743,27.476 322.142,26.077 322.142,22.499 318.902,19.26 316.688,19.26 316.54,19.111 316.54,18.901 Q1.1
NetQ1_3: Q1.3 R5.2 R6.1 | length 77.2
  Top Layer w0.254: R5.2 249.593,48.399 v1(249.606,48.412) ; v1(275.953,32.138) 275.964,32.138 278.482,29.621 278.482,26.572 286.08,18.974 305.546,18.974 Q1.3
  Bottom Layer w0.254: v1(249.606,48.412) 261.595,36.424 275.311,36.424 278.177,33.557
NetQ2_1: Q2.1 R7.2 | length 56
  Top Layer w0.254: R7.2 263.755,47.912 263.755,48.54 266.979,51.765 268.961,51.765 270.332,50.394 270.332,33.655 272.142,31.845 274.809,31.845 276.502,30.153 276.502,27.759 276.47,27.728 276.47,27.517 285.579,18.408 288.812,18.408 Q2.1
NetQ2_3: Q2.3 R11.2 R12.1 | length 57.7
  Top Layer w0.254: R11.2 v1(244.951,36.728) ; v1(269.215,35.408) 269.215,33.452 271.329,31.337 274.599,31.337 275.994,29.942 275.994,27.97 275.962,27.938 275.962,27.307 275.994,27.275 275.994,22.811 276.401,22.403 R12.1 277.567,18.734 Q2.3
  Bottom Layer w0.254: v1(244.951,36.728) 250.26,31.42 266.37,31.42 269.215,34.265 v1(269.215,35.408)
NetQ3_1: Q3.1 Q4.1 Q5.1 Q6.1 Q7.3 R13.1 R15.2 | length 283.5
  Top Layer w0.254: v1(237.922,24.359) 237.922,31.496 238.455,32.029 240.487,32.029 ; R13.1 237.388,39.58 237.388,36.424 240.487,33.325 240.487,32.029 ; R15.2 242.138,32.029 Q7.3 240.487,32.029
  Bottom Layer w0.254: Q6.1 163.015,10.592 192.564,10.592 Q4.1 198.432,9.855 ; v1(237.922,24.359) 235.483,21.92 155.042,21.92 147.371,14.249 147.371,11.176 148.692,9.855 198.432,9.855 ; Q5.1 260.95,9.804 232.73,9.804 Q3.1 226.482,9.855 198.432,9.855
NetQ3_2: Q3.2 Q4.2 Q5.2 Q6.2 R6.2 R12.2 | length 173.2
  Top Layer w4: Q6.2 155.218,13.406 158.856,17.043 186.03,17.043 Q4.2@189.636,13.437 ; Q4.2 191.501,14.988 191.501,15.466 192.821,16.786 220.289,16.786 Q3.2 225.952,14.785 225.952,15.263 227.272,16.583 254.876,16.583 Q5.2 260.403,14.718 260.403,15.195 267.61,22.403 R12.2 ; 273.304,25.959 273.304,28.647 R6.2
  Bottom Layer w0.254: Q3.2 226.254,15.088 233.731,15.088 238.328,10.49 256.176,10.49 Q5.2
NetQ3_3: Q3.3 Q4.3 Q5.3 Q6.3 R14.2 R26.1 | length 163.1
  Bottom Layer w4: Q6.3 154.559,17.729 179.638,17.729 Q4.3 187.839,16.786 214.829,16.786 Q3.3 223.182,17.475 248.524,17.475 Q5.3 261.866,21.641 289.081,21.641 R14.2
NetQ7_1: Q7.1 R16.1 | length 76.3
  Top Layer w0.254: R16.1 172.161,49.701 v1(172.161,47.574) ; v1(237.566,34.569) 237.566,33.528 238.115,32.979 Q7.1
  Bottom Layer w0.254: v1(172.161,47.574) 192.354,47.574 205.359,34.569 v1(237.566,34.569)
NetR1_1: R1.1 R4.2 U1.6 | length 17.8
  Top Layer w0.254: U1.6 242.113,52.756 242.392,52.476 242.824,52.476 244.323,50.978 244.323,48.038 R4.2 248.59,46.971 248.59,50.127 R1.1
NetR2_1: R2.1 R8.1 U5.8 | length 5.7
  Top Layer w0.254: R8.1 233.87,54.749 234.114,54.993 235.543,54.993 R2.1
NetR2_2: R2.2 R3.2 R4.1 R5.1 U1.2 | length 42.8
  Top Layer w0.254: R2.2 235.137,56.938 237.49,56.938 237.49,54.635 237.185,54.331 237.185,47.364 241.529,43.021 242.196,43.021 ; U1.2 240.843,44.374 242.196,43.021 ; R5.1 251.943,45.212 251.968,45.187 R3.2 251.412,43.863 251.412,44.514 251.155,44.771 248.154,44.771 248.154,44.185 R4.1 242.196,43.021
NetR7_1: R7.1 R10.2 U2.6 | length 60.8
  Top Layer w0.254: R10.2 240.894,35.306 v1(241.884,34.315) ; v1(254.508,30.404) 256.057,31.953 260.121,31.953 ; U2.6 259.842,31.674 260.121,31.953 ; R7.1 264.846,46.653 264.846,48.515 267.436,51.105 268.425,51.105 269.568,49.962 269.568,37.198 264.323,31.953 260.121,31.953
  Bottom Layer w0.254: v1(241.884,34.315) 245.796,30.404 v1(254.508,30.404)
NetR8_2: R8.2 R9.2 R10.1 R11.1 U2.2 | length 45
  Top Layer w0.254: R8.2 R9.2 236.22,47.101 240.894,42.427 R10.1 242.062,40.469 242.214,40.621 R11.1 244.011,41.224 247.421,41.224 248.031,41.834 248.031,43.155 248.662,43.786 248.662,44.263 250.479,44.263 250.876,43.866 250.876,40.074 251.025,39.925 252.817,39.925 253.04,39.702 253.04,37.155 253.314,36.881 261.087,36.881 261.112,36.855 U2.2
NetR16_2: R16.2 U3.32 | length 17.6
  Top Layer w0.254: U3.32 165.006,40.409 165.658,39.758 165.922,39.758 167.478,41.313 171.685,41.313 173.971,43.6 R16.2
NetR19_1: R19.1 R20.2 U4.3 | length 15.2
  Top Layer w0.254: R19.1 214.249,38.811 214.427,38.633 ; U4.3 216.56,32.918 215.29,34.188 215.29,37.77 214.427,38.633 ; R20.2 220.451,39.243 220.078,38.87 220.078,38.782 219.929,38.633 214.427,38.633
NetR22_1: R22.1 U5.2 | length 7.1
  Top Layer w0.254: R22.1 169.528,35.518 169.528,36.891 169.323,37.097 U5.2
NetR23_1: R23.1 U6.2
NetR24_1: R24.1 U6.1
NetR25_1: R25.1 U3.9 U6.3 | length 4.3
  Top Layer w0.254: R25.1 158.765,48.601 158.902,48.463 U3.9
NetR26_2: R26.2 U6.10 | length 2.7
  Top Layer w0.254: v1(169.291,28.626) 169.443,28.778 169.443,29.769 U6.10
NetR27_2: R27.2 U6.9
NetU3_27: U3.27 U5.6 U6.4
NetU3_28: U3.28 U5.5 U6.5 | length 13.4
  Top Layer w0.15: U5.5 168.687,39.155 168.747,39.155 168.884,39.292 169.187,39.292 169.692,38.787 172.012,38.787 173.295,40.07 173.419,40.07 174.795,38.694 U6.5@174.795,32.819
pads on no net: IC1.7 U1.1 U1.3 U1.5 U1.8 U2.1 U2.3 U2.5 U2.8 U3.1 U3.2 U3.11 U3.12 U3.19 U3.22 U3.23 U3.24 U3.25 U3.26 U3.30 U3.31 U4.5 U4.6 U4.7

## Polygon pours and split planes (outlines as drawn)
GND on Top Layer "GND_L01_P003" (solid, pour order 3): 142.062,7.747 324.256,7.747 324.256,63.856 142.062,63.856
NetQ3_2 on Top Layer "GND" (solid, pour order 2): 269.824,24.435 269.824,30.378 272.034,32.588 275.336,32.588 275.869,32.055 275.869,20.955 273.761,18.847 270.18,18.847 269.748,19.279
GND on Bottom Layer "GND_L02_P004" (solid, pour order 4): 142.062,7.747 324.256,7.747 324.256,63.856 142.062,63.856

## Text inside footprints (layer, text, board x,y; h text height)
Q9: Top 3D Body "*" at 259.499,42.862 h1.27 r270; Top Overlay "*" at 257.873,44.133 h1.27 r270